# EAGLE board 110719005_110719038 (EAGLE 7.6.0)

Size 73.58 x 228.49 mm. Coordinates in mm from the lower left corner, seen from the top.
Outline: 0,0 56.82,0 56.82,53.33 0,53.33 0,0
Copper layers (1*16): Top 0.035mm / dielectric 1.5mm / Bottom 0.035mm
Design rules "default": minimum track width 10mil, minimum drill 24mil, track to track 8mil, track to pad 8mil, pad to pad 8mil, via to via 8mil, smd to smd 8mil, copper to edge 40mil, drill to drill 8mil, minimum pad ring 10mil, minimum via ring 8mil, stop-mask expansion 4mil, vias tented up to drill 0mil, thermal gap 10mil

## Footprints (pad centres in the part's own frame; a part is rotated, then mirrored left to right if it is on the bottom)
LED5MM = drill 0.813 octagon: A -1.27,0; K 1.27,0
0207/10 = drill 0.813 octagon: 1 -5.08,0; 2 5.08,0
DIP04YL = drill 0.813 long: 1 -3.81,-3.81; 2 -1.27,-3.81; 3 1.27,-3.81; 4 3.81,-3.81; 5 3.81,3.81; 6 1.27,3.81; 7 -1.27,3.81; 8 -3.81,3.81
DIL14 = drill 0.813 long: 1 -7.62,-3.81; 2 -5.08,-3.81; 3 -2.54,-3.81; 4 0,-3.81; 5 2.54,-3.81; 6 5.08,-3.81; 7 7.62,-3.81; 8 7.62,3.81; 9 5.08,3.81; 10 2.54,3.81; 11 0,3.81; 12 -2.54,3.81; 13 -5.08,3.81; 14 -7.62,3.81
ARDUINO_UNO = drill 1.016 pad 1.88: 0 63.5,50.8; 1 60.96,50.8; 2 58.42,50.8; 3 55.88,50.8; 3.3V 35.56,2.54; 4 53.34,50.8; 5 50.8,50.8; 5V 38.1,2.54; 6 48.26,50.8; 7 45.72,50.8; 8 41.656,50.8; 9 39.116,50.8; 10 36.576,50.8; 11 34.036,50.8; 12 31.496,50.8; 13 28.956,50.8; A0 50.8,2.54; A1 53.34,2.54; A2 55.88,2.54; A3 58.42,2.54; A4 60.96,2.54; A5 63.5,2.54; AREF 23.876,50.8; GND 26.416,50.8; GND. 43.18,2.54; GND.. 40.64,2.54; I/OREF 30.48,2.54; N/C 27.94,2.54; RESET 33.02,2.54; SCL 18.796,50.8; SDA 21.336,50.8; VIN 45.72,2.54 | hole 3.2: 66.04,7.62; 66.04,35.56; 15.24,50.8; 13.97,2.54

## Placement (x,y rotation side)
D3  [LED5MM]  5,149.78 0 top
D4  [LED5MM]  5,162.48 0 top
R1  220‎Ω  [0207/10]  5,35.48 0 top
R2  220‎Ω  [0207/10]  5,48.18 0 top
R3  220‎Ω  [0207/10]  5,86.28 0 top
R4  220‎Ω  [0207/10]  5,111.68 0 top
R5  220‎Ω  [0207/10]  5,124.38 0 top
R6  220‎Ω  [0207/10]  5,137.08 0 top
SW1  [DIP04YL]  5,10.08 0 top
SW5  [DIP04YL]  5,73.58 0 top
U1  [DIL14]  5,22.78 0 top
U2  [DIL14]  5,60.88 0 top
U3  [DIL14]  5,98.98 0 top
U4  [ARDUINO_UNO]  5,175.18 0 top

## Library data of the parts
D3 D4 R1-R6 SW1 SW5 U1-U4 = AUTODESK_CIRCUITS_BREADBOARD

## Nets
N$1: U1.13
N$2: R3.1 U1.6 U2.2
N$3: U1.10
N$4: U1.8
N$5: U1.12
N$6: U1.9
N$7: U1.11
N$8: U1.3 U1.5
N$9: R1.1 SW1.8 U1.1
N$10: R2.1 SW1.7 U1.2
N$11: U2.13
N$12: U2.6
N$13: U2.9
N$14: U2.12
N$15: U2.8
N$16: U2.10
N$17: U2.11
N$18: SW5.5
N$19: SW5.6
N$20: U3.3 U3.5
N$21: U3.13
N$22: D3.K D4.K SW1.1 SW1.2 SW1.3 SW1.4 SW5.1 SW5.2 SW5.3 SW5.4 U1.7 U2.7 U3.7 U4.GND..
N$23: U3.9
N$24: U3.12
N$25: U3.8
N$26: U3.10
N$27: R1.2 R2.2 R4.2 R5.2 U1.14 U2.1 U2.4 U2.14 U3.14 U4.5V
N$28: U2.3 U3.2 U3.6
N$29: U3.11
N$30: R4.1 SW5.8 U3.1
N$31: D3.A R3.2
N$32: D4.A R6.2
N$33: R5.1 SW5.7 U3.4
N$34: R6.1 U1.4 U2.5
N$35: SW1.5
N$36: SW1.6

## Tracks (layer width: path | path; a pad name or v marks a point on that pad's centre or on a via)
N$2  (2 unrouted)
N$8  (1 unrouted)
N$9  (2 unrouted)
N$10  (2 unrouted)
N$20  (1 unrouted)
N$22  (13 unrouted)
N$27  (9 unrouted)
N$28  (2 unrouted)
N$30  (2 unrouted)
N$31  (1 unrouted)
N$32  (1 unrouted)
N$33  (2 unrouted)
N$34  (2 unrouted)